# Altium PCB 第二版.PcbDoc
Units mil, origin at the board's own origin, x right, y up, seen from the top; angles counter-clockwise.
Board outline 6000 x 4000 mil, 2 copper layers (Top Layer, Bottom Layer); 6 components, 35 nets, 19 pads, 5 vias.
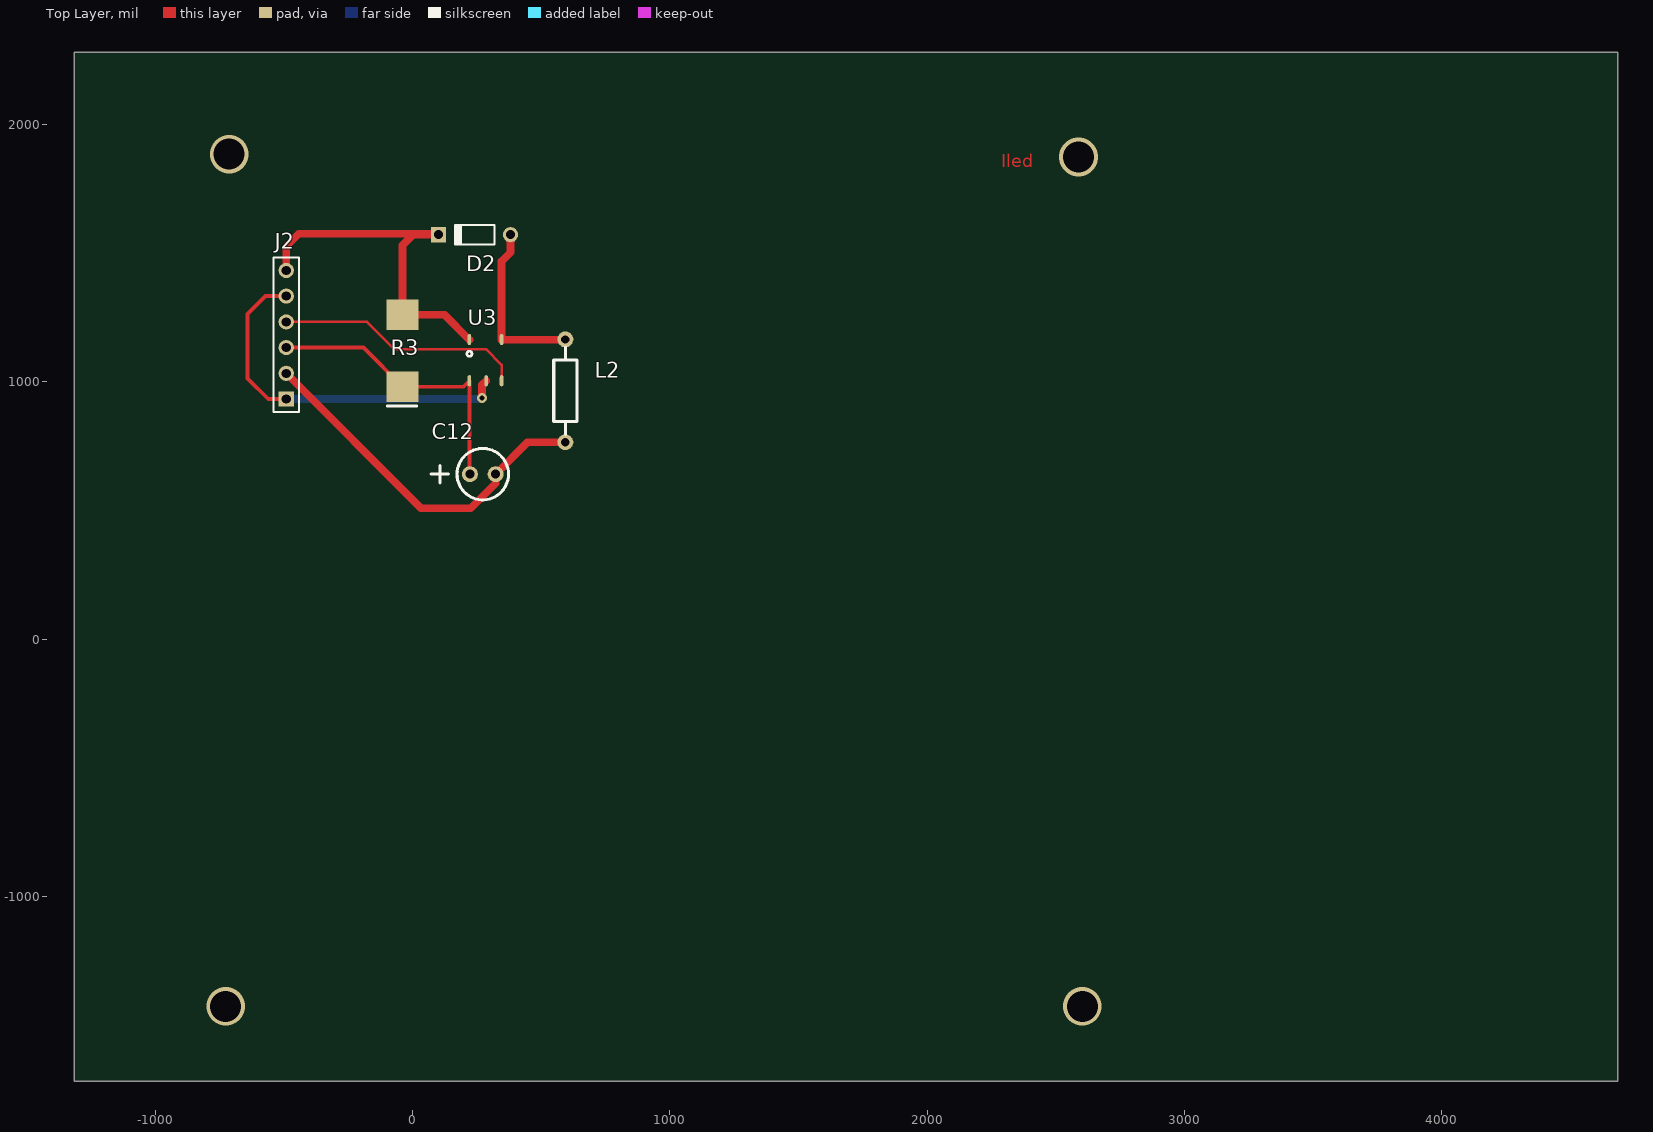
[diagram p0: Top Layer view]
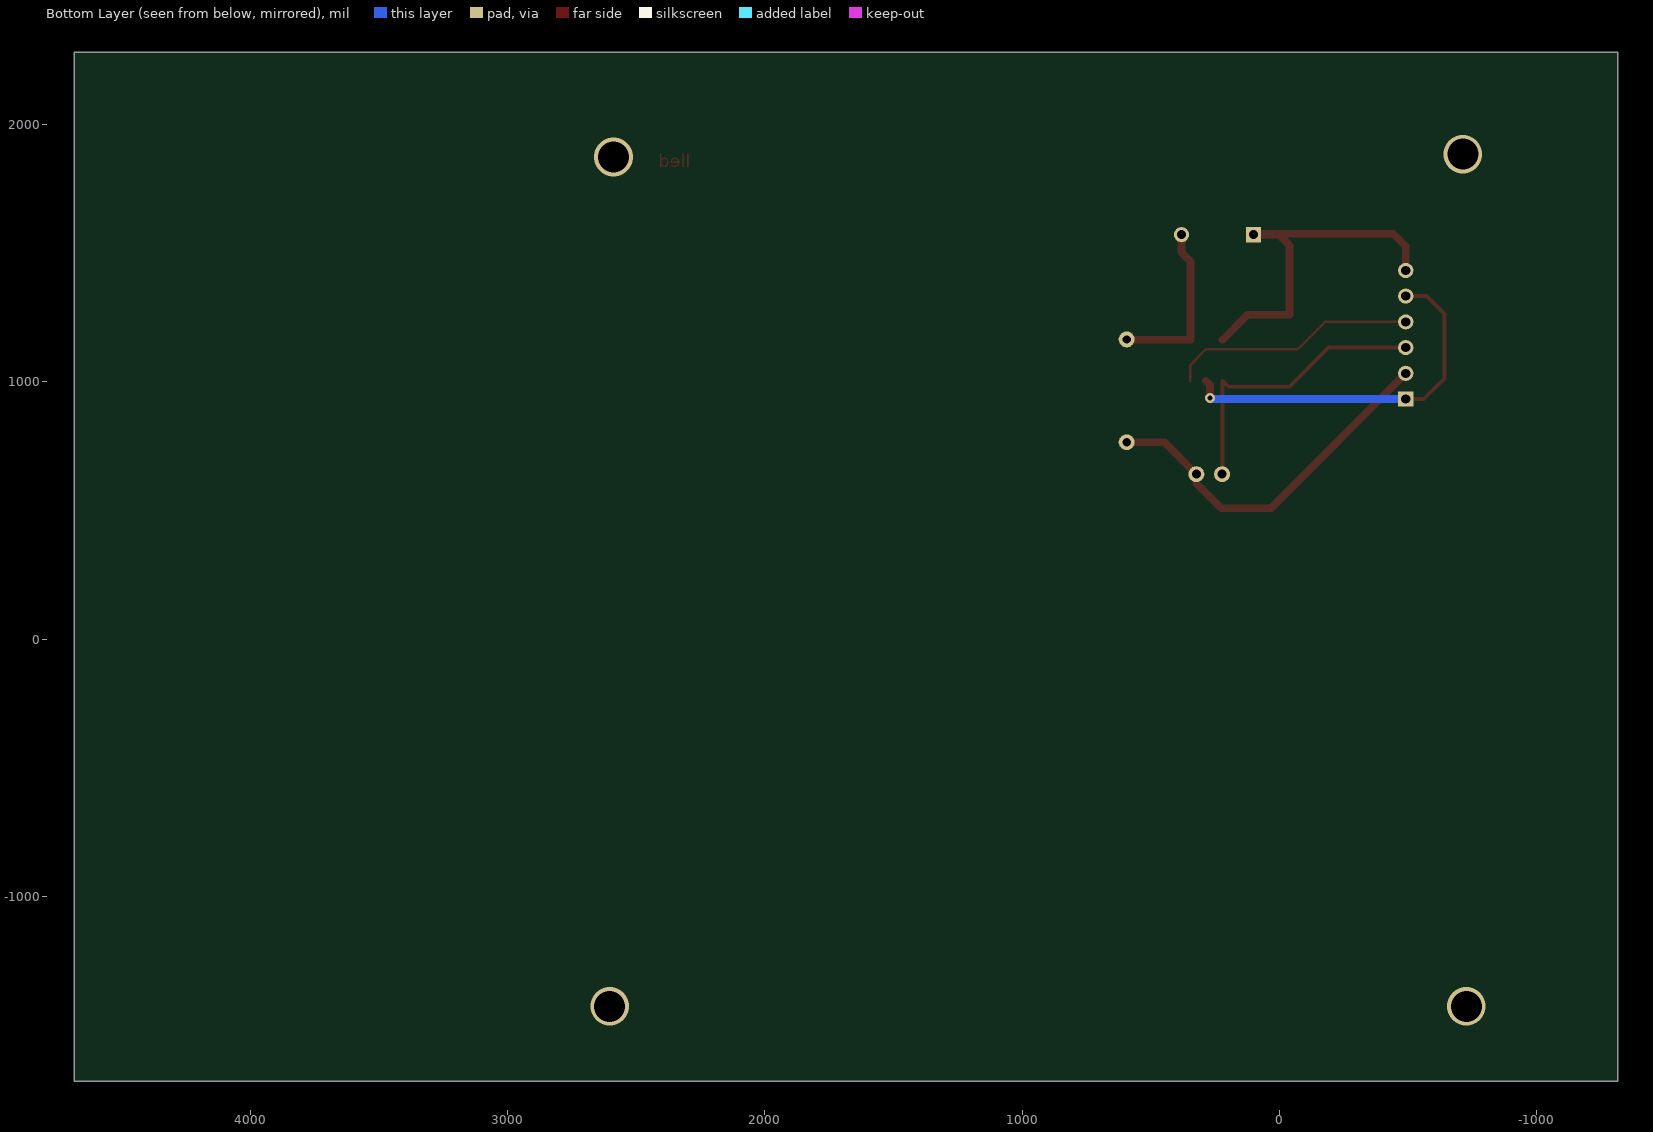
[diagram p1: Bottom Layer view, seen from below]

## Layer stack, top to bottom
Top Solder: solder mask 0.4, Solder Resist, Dk 3.5
Top Layer: signal copper 1.4
Dielectric 1: dielectric 12.6, FR-4, Dk 4.8
Bottom Layer: signal copper 1.4
Bottom Solder: solder mask 0.4, Solder Resist, Dk 3.5

## Board outline
-1315,-1719 4685,-1719 4685,2281 -1315,2281

## Design rules (kind name [scope] priority, off if disabled: settings)
Clearance [All] p1: gap=10
PolygonConnect PolygonConnect_1 [All] p1: connectstyle=Relief reliefconductorwidth=10 reliefentries=4 polygonreliefangle="90 Angle" airgapwidth=10
PolygonConnect [All] p2: connectstyle=Relief reliefconductorwidth=10 reliefentries=4 polygonreliefangle="90 Angle" airgapwidth=10
RoutingVias [All] p1: holewidth=28 width=50 viastyle="Through Hole" minholewidth=28 minwidth=50 maxholewidth=28 maxwidth=50
SolderMaskExpansion [All] p1: expansion=4
Width [All] p1: maxlimit=30 minlimit=10 preferedwidth=10 minimp=50.000000 maximp=50.000000 favimp=50.000000
29 further rules are at their usual default settings.

## Components (designator, comment, footprint, x,y, rotation, side; value= is the part's Value field where it differs from the comment)
C12 "电容_电解" 10UF 223,641 r0 top
D2 "1N4448" DO-35 241,1572 r180 top
J2 "CON6" HDR1X6 -491,933 r90 top
L2 "Inductor" AXIAL0.4_10mm 594,1165 r270 top
R3 "RES" 2512 -39,981 r90 top
U3 "BP1361" BSP1361 19791,36059 r0 top

## Footprints (in the part's own frame and the unit in brackets; to place one, negate y for a bottom-side part, rotate by r counter-clockwise, add the part's x,y. Pads: shape width x height; smd on the part's side, far side on the other; paste and mask are expansions set on the pad)
10UF [mil]
  round 62 hole 35.43: 1(0,0) 2(100,0)
  silkscreen extent -152,-100 150,100
2512 [mm]
  rect 3x3.2 smd: 1(0,0) 2(7.112,0)
  silkscreen extent -1.91,-1.4 -1.91,1.52
AXIAL0.4_10mm [mil]
  round 62 hole 32: 1(0,0) 2(400,0)
  silkscreen extent 30,-45 370,45
BSP1361 [mil]
  oval 14.17x43.31 smd: 1(-19570,-35055) 2(-19505,-35055) 3(-19445,-35055) 4(-19445,-34895) 5(-19570,-34895)
  silkscreen extent -19580,-34960 -19560,-34940
DO-35 [mm] "Diode, Axial; Body 3.8 x 1.9 mm (LxDia. max), Lead Dia. 0.53 mm (max)"
  round 1.5 hole 0.9: 1(-3.55,0)
  rect 1.5x1.5 hole 0.9: 2(3.55,0)
  silkscreen extent -1.95,-0.95 2.05,0.95
HDR1X6 [mm] "Connector; Header; 6 Position"
  rect 1.5x1.5 hole 0.9: 1(0,0)
  round 1.5 hole 0.9: 2(2.54,0) 3(5.08,0) 4(7.62,0) 5(10.16,0) 6(12.7,0)
  silkscreen extent -1.27,-1.27 13.97,1.27

## Part data
C12: "Capacitor"
D2: library part "Diode 1N4448", "High Conductance Fast Diode"
J2: "Connector"
R3: "Resistor"
U3: library part Component_1

## Via types
v1: diameter 150, hole 120, Top Layer to Bottom Layer, 4 vias
v2: diameter 40, hole 20, Top Layer to Bottom Layer, 1 vias

## Nets (pads, with @x,y where several pads share a name; then routed paths per layer and width w, separated by ;. In a path a pad name is that pad's centre, name@x,y a point inside that pad or via, vN(x,y) a via of type N, cw(c..) or ccw(c..) an arc to the next point about the centre after c; other vN are vias at no path point)
BIN: 
BOUT: 
GIN: C12.1 J2.3 R3.1 U3.1 | length 1148.3
  Top Layer w15: J2.3 -191,1133 R3.1 198,981 U3.1 221,643 C12.1
GND: J2.1 J2.5 U3.2 | length 1431.8
  Top Layer w15: J2.1 -561,933 -641,1013 -641,1264 -572,1333 J2.5
  Top Layer w30: v2(270,937) 270,988 U3.2
  Bottom Layer w30: J2.1 253,933 v2@254,932
GOUT: C12.2 J2.2 L2.2 | length 1428.6
  Top Layer w30: J2.2 33,509 226,509 323,606 C12.2 447,765 L2.2
NetC1_2: 
NetC2_2: 
NetC3_2: 
NetD1_1: 
NetD2_1: D2.1 L2.1 U3.4 | length 671
  Top Layer w30: D2.1 381,1571.76 381,1504 346,1469 U3.4 593,1164 L2.1
NetD3_1: 
NetD4_1: 
NetJ3_1: 
NetJ3_2: 
NetJ3_3: 
NetJ3_4: 
NetJ3_5: 
NetJ3_6: 
NetJ3_7: 
NetJ3_8: 
NetJ3_9: 
NetJ3_10: 
NetJ3_11: 
P1.3: 
P1.4: J2.4 U3.3 | length 968.2
  Top Layer w10: J2.4 -177,1233 -71.35,1127.35 284.65,1127.35 346,1066 U3.3
P2.2: 
P2.3: 
RIN: 
ROUT: 
RXD: 
TXD: 
VCC: D2.2 J2.6 R3.2 U3.5 | length 1435.6
  Top Layer w30: J2.6 -491,1527 -442,1576 97.24,1576 D2.2 2,1572 -39,1531 R3.2 124,1261 U3.5
VCC3.3: 
WIN: 
WOUT: 
copper on no net:
  other v1: -727,-1428 2604,-1428 2589,1874 -713,1885

## Other copper
Top Layer:
  text "Iled" at 2289,1834 h50

## Silkscreen, mask and mechanical layers (free items; w line width, h text height)
Top Solder:
  rectangle: 2266,1818 2475,1917
Mechanical 1:
  lines w5: -815,-1519 -815,1781 -815,1981 2685,1981 2685,-1519 -815,-1519